# EAGLE board HumidityMetter_TO_PRINT (EAGLE 6.1)
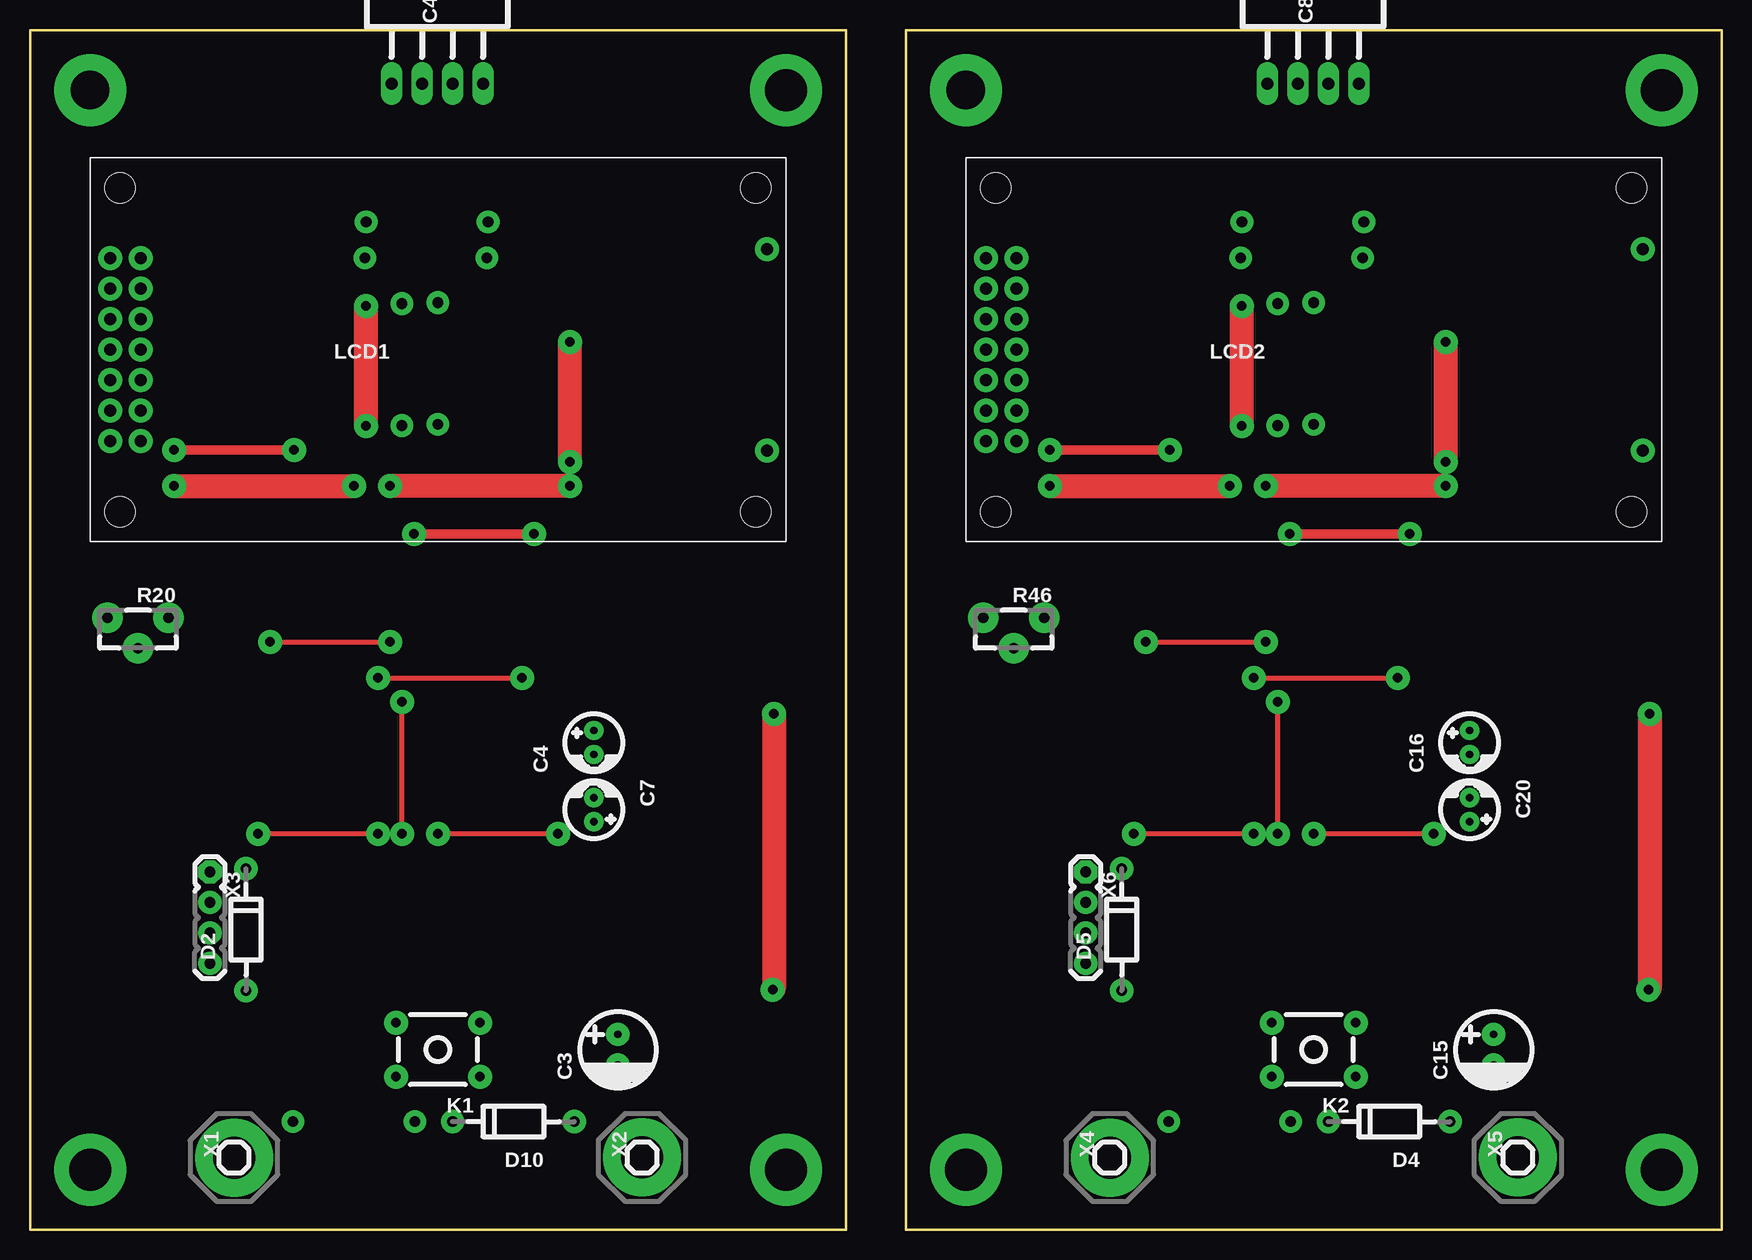
[diagram p0: board, top side]
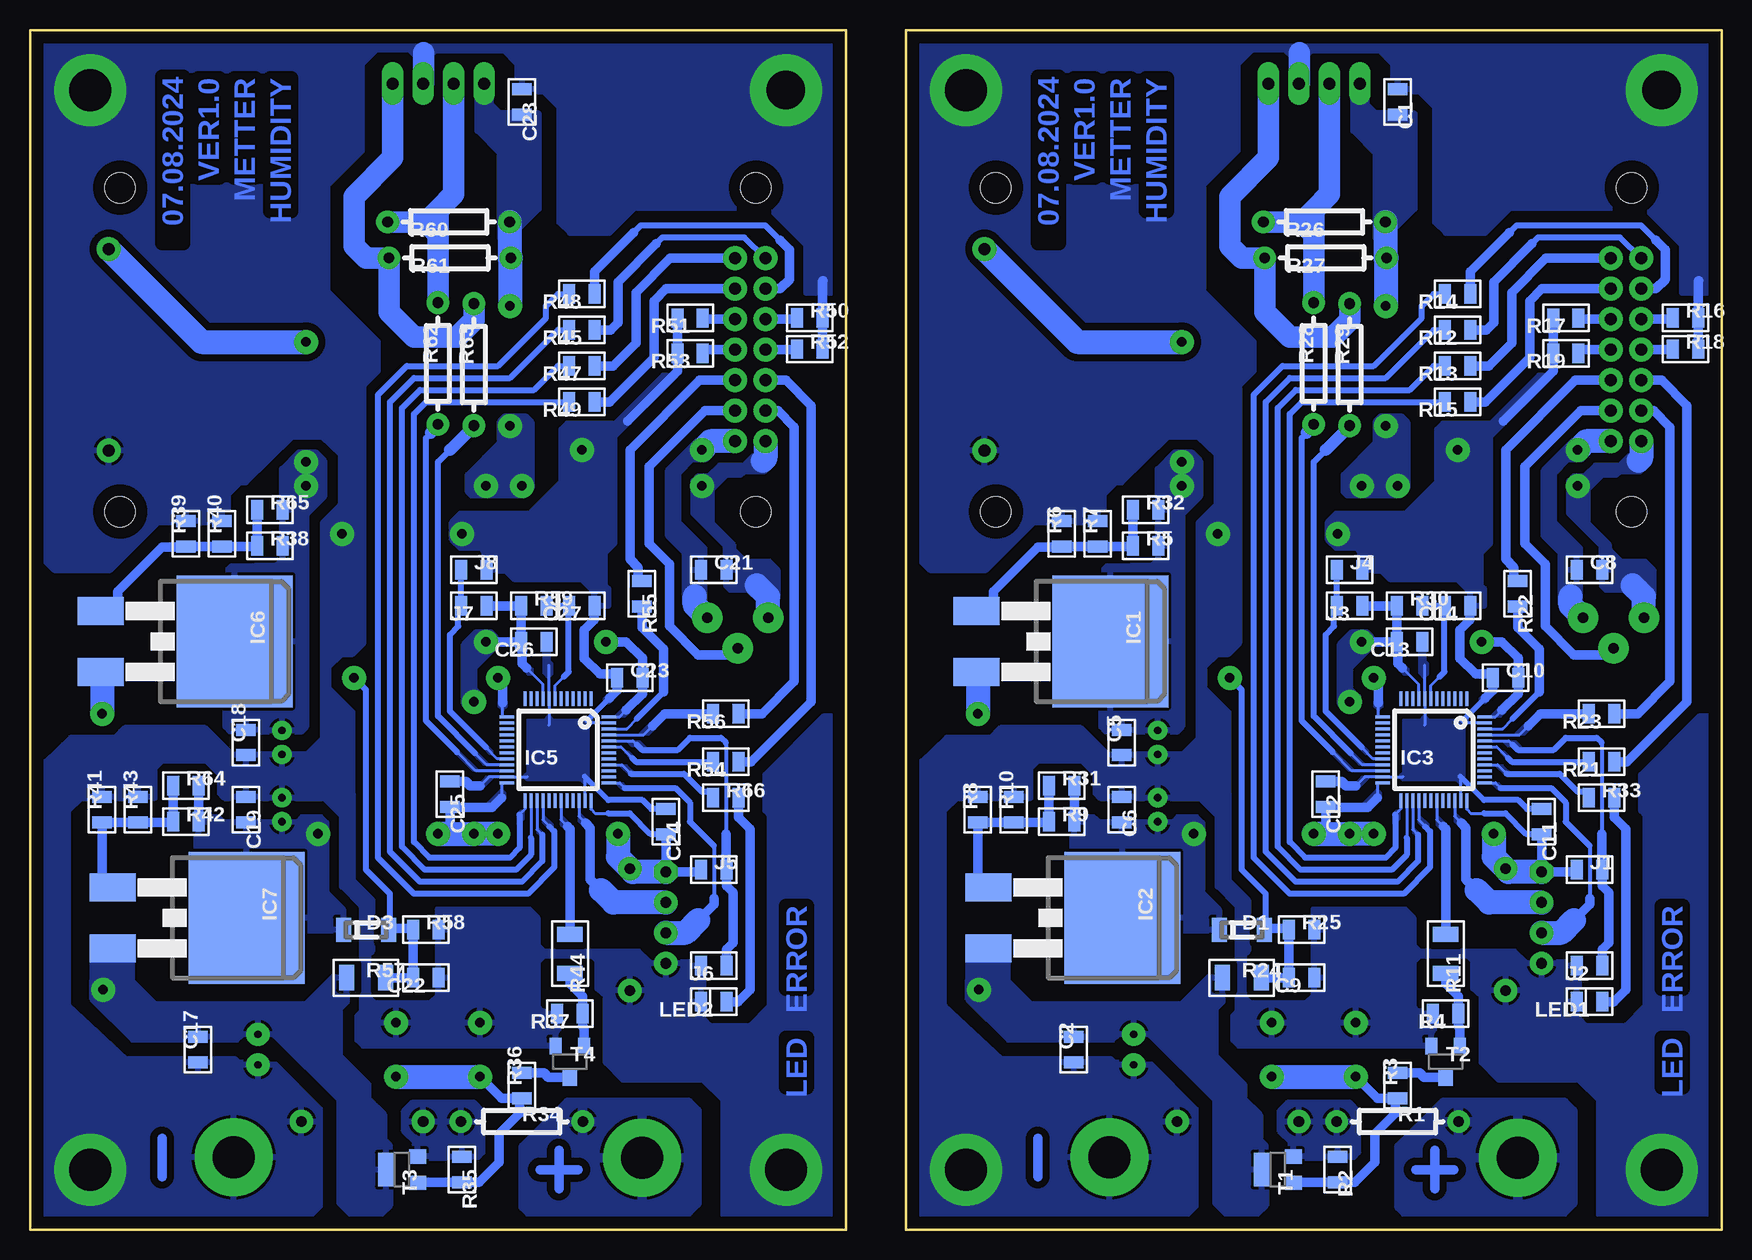
[diagram p1: board, bottom side, seen from below]

Size 141 x 100 mm. Coordinates in mm from the lower left corner, seen from the top.
Outline: 68,0 68,100 0,100 0,0 68,0
Outline: 141,0 141,100 73,100 73,0 141,0
Copper layers (1*16): Top 0.035mm / dielectric 1.5mm / Bottom 0.035mm
Design rules: minimum track width 0.25mm, minimum drill 0.6mm, track to track 0.25mm, track to pad 0.25mm, pad to pad 0.25mm, via to via 0.25mm, smd to smd 0mil, copper to edge 1mm, drill to drill 0.5mm, minimum pad ring 10mil, minimum via ring 8mil, stop-mask expansion 4mil, vias tented up to drill 0mil, thermal gap 10mil

## Footprints (pad centres in the part's own frame; a part is rotated, then mirrored left to right if it is on the bottom)
RSMD_0805 = smd 1 x 1.6: PAD_0 -1.05,0; PAD_1 1.05,0
CE_6.3MM = drill 0.6 pad 1.93: MINUS -1.27,0; PLUS 1.27,0
CE_5.2MM = drill 0.6 pad 1.6: MINUS -1,0; PLUS 1,0
SOD-80 = smd 1.25 x 2: ANODE 1.875,0; CATHODE -1.875,0
DO-41_10MM = drill 0.9 pad 1.93: ANODE -5.08,0; CATHODE 5.08,0
D2PAK = smd 2.32 x 3.81: 1 -2.54,-11.17; 3 2.54,-11.17 | smd 11 x 9.65: 2 0,0
LQFP48 = smd 0.25 x 1.2: 1 -2.75,-4.25; 2 -2.25,-4.25; 3 -1.75,-4.25; 4 -1.25,-4.25; 5 -0.75,-4.25; 6 -0.25,-4.25; 7 0.25,-4.25; 8 0.75,-4.25; 9 1.25,-4.25; 10 1.75,-4.25; 11 2.25,-4.25; 12 2.75,-4.25; 25 2.75,4.25; 26 2.25,4.25; 27 1.75,4.25; 28 1.25,4.25; 29 0.75,4.25; 30 0.25,4.25; 31 -0.25,4.25; 32 -0.75,4.25; 33 -1.25,4.25; 34 -1.75,4.25; 35 -2.25,4.25; 36 -2.75,4.25 | smd 1.2 x 0.25: 13 4.25,-2.75; 14 4.25,-2.25; 15 4.25,-1.75; 16 4.25,-1.25; 17 4.25,-0.75; 18 4.25,-0.25; 19 4.25,0.25; 20 4.25,0.75; 21 4.25,1.25; 22 4.25,1.75; 23 4.25,2.25; 24 4.25,2.75; 37 -4.25,2.75; 38 -4.25,2.25; 39 -4.25,1.75; 40 -4.25,1.25; 41 -4.25,0.75; 42 -4.25,0.25; 43 -4.25,-0.25; 44 -4.25,-0.75; 45 -4.25,-1.25; 46 -4.25,-1.75; 47 -4.25,-2.25; 48 -4.25,-2.75
AM2320_HOR = drill 1 pad 1.8 long: 1 -4.5,3.81; 2 -4.5,1.27; 3 -4.5,-1.27; 4 -4.5,-3.81
KEY_7X4.5 = drill 0.8 pad 2: 1 -3.5,-2.25; 2 3.5,-2.25; 3 3.5,2.25; 4 -3.5,2.25
LCD_0802B(CHINA_CLONE) = drill 1 pad 2: 1 4.24,8.38; 2 1.7,8.38; 3 4.24,10.92; 4 1.7,10.92; 5 4.24,13.46; 6 1.7,13.46; 7 4.24,16; 8 1.7,16; 9 4.24,18.54; 10 1.7,18.54; 11 4.24,21.08; 12 1.7,21.08; 13 4.24,23.62; 14 1.7,23.62; A 56.44,24.4; K 56.44,7.6 | hole 2.5: 2.5,2.5; 2.5,29.5; 55.5,29.5; 55.5,2.5
LED_0805 = smd 1 x 1.6: ANODE -1.05,0; CATHODE 1.05,0
R0207 = drill 0.9 pad 1.9: PAD1 5.08,0; PAD_0 -5.08,0
RSMD_1206_BIG_GAP = smd 1.25 x 2.1: PAD_0 -1.625,0; PAD_1 1.625,0
R_ADJ_STAND = drill 0.9 pad 2.54: 1 -2.54,0; 2 0,2.54; 3 2.54,0
SOT23 = smd 1.2 x 1.4: 1 1.1,1.3; 2 -1.1,1.3 | smd 2.8 x 1.4: 3 0,-1.3
SOT23_SMALL_PADS = smd 1 x 1.4: 1 1.2,1.3; 2 -1.2,1.3 | smd 1.2 x 1.4: 3 0,-1.3
PIN1X1_D3.5MM = drill 3.5 pad 6.5: 1 0,0
PIN4X1_2.54MM = drill 0.9 pad 1.93 octagon: 1 -3.81,0 | drill 0.9 pad 1.93: 2 -1.27,0; 3 1.27,0; 4 3.81,0

## Placement (x,y rotation side)
C1  0.1uF  [RSMD_0805]  27,94 270 bottom
C2  0.1uF  [RSMD_0805]  54,15 90 bottom
C3  100uFx16V  [CE_6.3MM]  49,15 90 top
C4  10uF x 10V  [CE_5.2MM]  47,40.6 90 top
C5  0.1uF  [RSMD_0805]  50,40.6 90 bottom
C6  0.1uF  [RSMD_0805]  50,35 270 bottom
C7  10uF x 10V  [CE_5.2MM]  47,35 270 top
C8  0.1uF  [RSMD_0805]  11,55 0 bottom
C9  0.1uF  [RSMD_0805]  35,21 180 bottom
C10  0.1uF  [RSMD_0805]  18,46 0 bottom
C11  0.1uF  [RSMD_0805]  15,34 270 bottom
C12  0.1uF  [RSMD_0805]  33,36.3 270 bottom
C13  0.1uF  [RSMD_0805]  26,49 180 bottom
C14  0.1uF  [RSMD_0805]  22,52 180 bottom
C15  100uFx16V  [CE_6.3MM]  122,15 90 top
C16  10uF x 10V  [CE_5.2MM]  120,40.6 90 top
C17  0.1uF  [RSMD_0805]  127,15 90 bottom
C18  0.1uF  [RSMD_0805]  123,40.6 90 bottom
C19  0.1uF  [RSMD_0805]  123,35 270 bottom
C20  10uF x 10V  [CE_5.2MM]  120,35 270 top
C21  0.1uF  [RSMD_0805]  84,55 0 bottom
C22  0.1uF  [RSMD_0805]  108,21 180 bottom
C23  0.1uF  [RSMD_0805]  91,46 0 bottom
C24  0.1uF  [RSMD_0805]  88,34 270 bottom
C25  0.1uF  [RSMD_0805]  106,36.3 270 bottom
C26  0.1uF  [RSMD_0805]  99,49 180 bottom
C27  0.1uF  [RSMD_0805]  95,52 180 bottom
C28  0.1uF  [RSMD_0805]  100,94 270 bottom
D1  LL4148  [SOD-80]  39.98,24.98 0 bottom
D2  1N4007  [DO-41_10MM]  18,25 90 top
D3  LL4148  [SOD-80]  112.98,24.98 0 bottom
D4  1N4007  [DO-41_10MM]  113.3,9 180 top
D5  1N4007  [DO-41_10MM]  91,25 90 top
D10  1N4007  [DO-41_10MM]  40.3,9 180 top
IC1  LM317  [D2PAK]  50.94,49.03 270 bottom
IC2  LM317  [D2PAK]  49.94,25.98 270 bottom
IC3  STM32F103C8T6  [LQFP48]  24,40 180 bottom
IC4  AM2320  [AM2320_HOR]  33.95,100.04 90 top
IC5  STM32F103C8T6  [LQFP48]  97,40 180 bottom
IC6  LM317  [D2PAK]  123.94,49.03 270 bottom
IC7  LM317  [D2PAK]  122.94,25.98 270 bottom
IC8  AM2320  [AM2320_HOR]  106.95,100.04 90 top
J1  0  [RSMD_0805]  11,30 0 bottom
J2  0  [RSMD_0805]  11,22 180 bottom
J3  0  [RSMD_0805]  31,52 180 bottom
J4  0  [RSMD_0805]  31,55 0 bottom
J5  0  [RSMD_0805]  84,30 0 bottom
J6  0  [RSMD_0805]  84,22 180 bottom
J7  0  [RSMD_0805]  104,52 180 bottom
J8  0  [RSMD_0805]  104,55 0 bottom
K1  POWER_ON  [KEY_7X4.5]  34,15 180 top
K2  POWER_ON  [KEY_7X4.5]  107,15 180 top
LCD1  LCD_0802B  [LCD_0802B(CHINA_CLONE)]  5,57.34 0 top
LCD2  LCD_0802B  [LCD_0802B(CHINA_CLONE)]  78,57.34 0 top
LED1  ERROR(RED)  [LED_0805]  11,19 180 bottom
LED2  ERROR(RED)  [LED_0805]  84,19 180 bottom
R1  1 Ohm  [R0207]  27,9 0 bottom
R2  10K  [RSMD_0805]  32,5 270 bottom
R3  1K0  [RSMD_0805]  27,12 90 bottom
R4  10K  [RSMD_0805]  23,18 180 bottom
R5  1K0  [RSMD_0805]  48,57 0 bottom
R6  3K0  [RSMD_0805]  55,58 90 bottom
R7  *  [RSMD_0805]  52,58 90 bottom
R8  3K9  [RSMD_0805]  62,35 90 bottom
R9  2K2  [RSMD_0805]  55,34 0 bottom
R10  *  [RSMD_0805]  59,35 90 bottom
R11  1K0  [RSMD_1206_BIG_GAP]  23,23 270 bottom
R12  390R  [RSMD_0805]  22,75 180 bottom
R13  390R  [RSMD_0805]  22,72 180 bottom
R14  390R  [RSMD_0805]  22,78 180 bottom
R15  390R  [RSMD_0805]  22,69 180 bottom
R16  2K0  [RSMD_0805]  3,76 0 bottom
R17  2K0  [RSMD_0805]  12.97,75.99 180 bottom
R18  2K0  [RSMD_0805]  3,73.4 0 bottom
R19  2K0  [RSMD_0805]  12.97,73.05 180 bottom
R20  10K  [R_ADJ_STAND]  9,51 180 top
R21  390R  [RSMD_0805]  10,39 180 bottom
R22  390R  [RSMD_0805]  17,53 270 bottom
R23  390R  [RSMD_0805]  10,43 180 bottom
R24  18K  [RSMD_1206_BIG_GAP]  40,21 0 bottom
R25  6K8  [RSMD_0805]  35,25 0 bottom
R26  4K7  [R0207]  33.1,84 180 bottom
R27  4K7  [R0207]  33,81 180 bottom
R28  200R  [R0207]  34,72.2 90 bottom
R29  200R  [R0207]  31,72.1 90 bottom
R30  10K  [RSMD_0805]  26,52 0 bottom
R31  *  [RSMD_0805]  55,37 0 bottom
R32  *  [RSMD_0805]  48,60 0 bottom
R33  1K0  [RSMD_0805]  10,36 0 bottom
R34  1 Ohm  [R0207]  100,9 0 bottom
R35  10K  [RSMD_0805]  105,5 270 bottom
R36  1K0  [RSMD_0805]  100,12 90 bottom
R37  10K  [RSMD_0805]  96,18 180 bottom
R38  1K0  [RSMD_0805]  121,57 0 bottom
R39  3K0  [RSMD_0805]  128,58 90 bottom
R40  *  [RSMD_0805]  125,58 90 bottom
R41  3K9  [RSMD_0805]  135,35 90 bottom
R42  2K2  [RSMD_0805]  128,34 0 bottom
R43  *  [RSMD_0805]  132,35 90 bottom
R44  1K0  [RSMD_1206_BIG_GAP]  96,23 270 bottom
R45  390R  [RSMD_0805]  95,75 180 bottom
R46  10K  [R_ADJ_STAND]  82,51 180 top
R47  390R  [RSMD_0805]  95,72 180 bottom
R48  390R  [RSMD_0805]  95,78 180 bottom
R49  390R  [RSMD_0805]  95,69 180 bottom
R50  2K0  [RSMD_0805]  76,76 0 bottom
R51  2K0  [RSMD_0805]  85.97,75.99 180 bottom
R52  2K0  [RSMD_0805]  76,73.4 0 bottom
R53  2K0  [RSMD_0805]  85.97,73.05 180 bottom
R54  390R  [RSMD_0805]  83,39 180 bottom
R55  390R  [RSMD_0805]  90,53 270 bottom
R56  390R  [RSMD_0805]  83,43 180 bottom
R57  18K  [RSMD_1206_BIG_GAP]  113,21 0 bottom
R58  6K8  [RSMD_0805]  108,25 0 bottom
R59  10K  [RSMD_0805]  99,52 0 bottom
R60  4K7  [R0207]  106.1,84 180 bottom
R61  4K7  [R0207]  106,81 180 bottom
R62  200R  [R0207]  107,72.2 90 bottom
R63  200R  [R0207]  104,72.1 90 bottom
R64  *  [RSMD_0805]  128,37 0 bottom
R65  *  [RSMD_0805]  121,60 0 bottom
R66  1K0  [RSMD_0805]  83,36 0 bottom
T1  BSS84  [SOT23]  37,5 270 bottom
T2  BC847  [SOT23_SMALL_PADS]  23,14 0 bottom
T3  BSS84  [SOT23]  110,5 270 bottom
T4  BC847  [SOT23_SMALL_PADS]  96,14 0 bottom
X1  +9V  [PIN1X1_D3.5MM]  17,6 90 top
X2  GND  [PIN1X1_D3.5MM]  51.02,6.01 90 top
X3  ISP  [PIN4X1_2.54MM]  15,26 270 top
X4  +9V  [PIN1X1_D3.5MM]  90,6 90 top
X5  GND  [PIN1X1_D3.5MM]  124.02,6.01 90 top
X6  ISP  [PIN4X1_2.54MM]  88,26 270 top

## Library data of the parts
C1-C28 D1-D5 D10 IC1-IC8 J1-J8 K1 K2 LCD1 LCD2 LED1 LED2 R1-R66 T1-T4 X1-X6 = __MyCommonLib1

## Nets
+3.3V: C6.PAD_1 C7.PLUS C10.PAD_1 C11.PAD_1 C12.PAD_1 C13.PAD_1 D1.CATHODE D2.CATHODE IC2.2 IC3.9 IC3.24 IC3.36 IC3.48 J1.PAD_0 J3.PAD_0 R9.PAD_1 R30.PAD_0 R31.PAD_1 X3.1
+3.3V1: C19.PAD_1 C20.PLUS C23.PAD_1 C24.PAD_1 C25.PAD_1 C26.PAD_1 D3.CATHODE D5.CATHODE IC5.9 IC5.24 IC5.36 IC5.48 IC7.2 J5.PAD_0 J7.PAD_0 R42.PAD_1 R59.PAD_0 R64.PAD_1 X6.1
+5V: C1.PAD_1 C4.PLUS C5.PAD_1 C8.PAD_1 IC1.2 IC4.1 LCD1.2 LCD1.A R5.PAD_1 R20.3 R26.PAD_0 R27.PAD_0 R32.PAD_1
+5V1: C16.PLUS C18.PAD_1 C21.PAD_1 C28.PAD_1 IC6.2 IC8.1 LCD2.2 LCD2.A R38.PAD_1 R46.3 R60.PAD_0 R61.PAD_0 R65.PAD_1
ADC_9V: C9.PAD_1 D1.ANODE IC3.13 R24.PAD_1 R25.PAD_0
ADC_9V1: C22.PAD_1 D3.ANODE IC5.13 R57.PAD_1 R58.PAD_0
BOOT0: IC3.44 J1.PAD_1 J2.PAD_0
BOOT1: IC3.20 J3.PAD_1 J4.PAD_0
BOOT2: IC5.20 J7.PAD_1 J8.PAD_0
BOOT3: IC5.44 J5.PAD_1 J6.PAD_0
ERROR_LED: IC3.40 R33.PAD_0
ERROR_LED1: IC5.40 R66.PAD_0
GND: C1.PAD_0 C2.PAD_0 C3.MINUS C4.MINUS C5.PAD_0 C6.PAD_0 C7.MINUS C8.PAD_0 C9.PAD_0 C10.PAD_0 C11.PAD_0 C12.PAD_0 C13.PAD_0 C14.PAD_0 D2.ANODE D10.ANODE IC3.8 IC3.23 IC3.35 IC3.47 IC4.3 J2.PAD_1 J4.PAD_1 K1.1 K1.2 LCD1.1 LCD1.K LED1.CATHODE R4.PAD_1 R6.PAD_1 R7.PAD_1 R8.PAD_1 R10.PAD_1 R16.PAD_1 R17.PAD_1 R18.PAD_1 R19.PAD_1 R20.1 R25.PAD_1 T2.2 X2.1 X3.4
GND1: C15.MINUS C16.MINUS C17.PAD_0 C18.PAD_0 C19.PAD_0 C20.MINUS C21.PAD_0 C22.PAD_0 C23.PAD_0 C24.PAD_0 C25.PAD_0 C26.PAD_0 C27.PAD_0 C28.PAD_0 D4.ANODE D5.ANODE IC5.8 IC5.23 IC5.35 IC5.47 IC8.3 J6.PAD_1 J8.PAD_1 K2.1 K2.2 LCD2.1 LCD2.K LED2.CATHODE R37.PAD_1 R39.PAD_1 R40.PAD_1 R41.PAD_1 R43.PAD_1 R46.1 R50.PAD_1 R51.PAD_1 R52.PAD_1 R53.PAD_1 R58.PAD_1 T4.2 X5.1 X6.4
I2C_SCL: IC3.21 R29.PAD_0
I2C_SCL1: IC5.21 R63.PAD_0
I2C_SDA: IC3.22 R28.PAD_0
I2C_SDA1: IC5.22 R62.PAD_0
LCD_D1: IC5.27 R45.PAD_1
LCD_D2: IC5.26 R47.PAD_1
LCD_D3: IC5.28 R48.PAD_1
LCD_D4: IC3.25 R15.PAD_1
LCD_D5: IC3.28 R14.PAD_1
LCD_D6: IC3.26 R13.PAD_1
LCD_D7: IC3.27 R12.PAD_1
LCD_D8: IC5.25 R49.PAD_1
LCD_E: IC3.43 R21.PAD_1
LCD_E1: IC5.43 R54.PAD_1
LCD_R/~W: IC3.46 R22.PAD_1
LCD_R/~W1: IC5.46 R55.PAD_1
LCD_RS: IC3.45 R23.PAD_1
LCD_RS1: IC5.45 R56.PAD_1
N$1: R1.PAD1 X1.1
N$2: D10.CATHODE R1.PAD_0 R2.PAD_0 T1.2
N$3: K1.3 K1.4 R2.PAD_1 R3.PAD_0 T1.1
N$4: R3.PAD_1 T2.3
N$5: R4.PAD_0 R11.PAD_1 T2.1
N$6: C2.PAD_1 C3.PLUS IC1.3 IC2.3 R24.PAD_0 T1.3
N$7: IC1.1 R5.PAD_0 R6.PAD_0 R7.PAD_0 R32.PAD_0
N$8: IC2.1 R8.PAD_0 R9.PAD_0 R10.PAD_0 R31.PAD_0
N$9: LCD1.3 R20.2
N$10: LCD1.14 R12.PAD_0
N$11: LCD1.13 R13.PAD_0
N$12: LCD1.12 R14.PAD_0
N$13: LCD1.11 R15.PAD_0
N$14: IC4.2 R26.PAD1 R28.PAD1
N$15: LCD1.10 R16.PAD_0
N$16: LCD1.9 R17.PAD_0
N$17: LCD1.8 R18.PAD_0
N$18: LCD1.7 R19.PAD_0
N$19: LED1.ANODE R33.PAD_1
N$20: IC4.4 R27.PAD1 R29.PAD1
N$21: LCD1.4 R23.PAD_0
N$22: LCD1.5 R22.PAD_0
N$23: LCD1.6 R21.PAD_0
N$24: R34.PAD1 X4.1
N$25: D4.CATHODE R34.PAD_0 R35.PAD_0 T3.2
N$26: K2.3 K2.4 R35.PAD_1 R36.PAD_0 T3.1
N$27: R36.PAD_1 T4.3
N$29: R37.PAD_0 R44.PAD_1 T4.1
N$31: C15.PLUS C17.PAD_1 IC6.3 IC7.3 R57.PAD_0 T3.3
N$32: IC6.1 R38.PAD_0 R39.PAD_0 R40.PAD_0 R65.PAD_0
N$33: IC7.1 R41.PAD_0 R42.PAD_0 R43.PAD_0 R64.PAD_0
N$34: LCD2.14 R45.PAD_0
N$35: LCD2.13 R47.PAD_0
N$36: LCD2.12 R48.PAD_0
N$37: LCD2.11 R49.PAD_0
N$38: LCD2.10 R50.PAD_0
N$39: LCD2.9 R51.PAD_0
N$40: LCD2.8 R52.PAD_0
N$41: LCD2.7 R53.PAD_0
N$42: LCD2.4 R56.PAD_0
N$43: LCD2.5 R55.PAD_0
N$44: LCD2.6 R54.PAD_0
N$45: IC8.2 R60.PAD1 R62.PAD1
N$46: IC8.4 R61.PAD1 R63.PAD1
N$47: LCD2.3 R46.2
N$48: LED2.ANODE R66.PAD_1
NRST: C14.PAD_1 IC3.7 R30.PAD_1
NRST1: C27.PAD_1 IC5.7 R59.PAD_1
PWR_HOLD: IC3.31 R11.PAD_0
PWR_HOLD1: IC5.31 R44.PAD_0
SWDCLK: IC3.37 X3.3
SWDCLK1: IC5.37 X6.3
SWDIO: IC3.34 X3.2
SWDIO1: IC5.34 X6.2

## Tracks (layer width: path | path; a pad name or v marks a point on that pad's centre or on a via)
+3.3V  (via drill 0.8 pad 2)
  Top 0.4: v31,33 v31,44 | v44,33 v34,33 | v29,33 v19,33
  Top 0.406: v20,49 v30,49
  Bottom 0.25: IC3.24 28.7,37.25 28.7,36 | IC3.9 25.25,45.45 26.6,46.8 | IC3.48 18.85,42.75 18.3,43.3 | IC3.36 21.25,35.05 20.9,34.7 19.8,34.7
  Bottom 0.4: 49.81,25.86 IC2.2
  Bottom 0.406: 27,48.95 C13.PAD_1
  Bottom 0.5: 19.8,34.7 18,34.7 16.3,33 15.05,33 C11.PAD_1
  Bottom 0.8: 28.7,36 29.5,35.2 32.95,35.2 C12.PAD_1 33,33.5 33.5,33 | 26.6,46.8 27,47.2 27,48.95 | v30,49 C13.PAD_1 R30.PAD_0 J3.PAD_0 | v20,49 18.3,49 16.95,47.65 C10.PAD_1 16.95,44.65 18.3,43.3 | C11.PAD_1 14.9,32.85 15,32.75 X3.1 12.24,29.81 J1.PAD_0 | R31.PAD_1 R9.PAD_1
  Bottom 2: v29,33 v31,33 33.5,33 v34,33 | X3.1 17.73,29.81 D2.CATHODE 19,31.08 v19,33
  pour Bottom: 30.8,43.3 31.3,43.3 31.8,43.8 31.8,48.8 30.8,49.8 29.6,49.8 29.2,49.4 29.2,48.6 31,46.8 31,45.1 30.3,44.4 30.3,43.8
  pour Bottom: 54.1,21.1 54.1,34.4 52.4,34.4 51.9,34 45.7,34 45.3,34.4 43.8,34.4 43.3,33.9 43.3,28.1 41.9,26.7 41.9,24.9 45.9,24.9 45.9,21.1
  pour Bottom (no thermals): 19.2,42.8 18.4,42.8 18,43.2 18.4,43.6
  pour Bottom: 28.9,35.4 28.4,35.9 28.4,36.4 28.7,36.7 30,35.4
  pour Bottom: 26.9,46.7 26.5,46.3 26.1,46.3 26.1,46.7 26.5,47.1
+3.3V1  (via drill 0.8 pad 2)
  Top 0.4: v104,33 v104,44 | v117,33 v107,33 | v102,33 v92,33
  Top 0.406: v93,49 v103,49
  Bottom 0.25: IC5.24 101.7,37.25 101.7,36 | IC5.9 98.25,45.45 99.6,46.8 | IC5.48 91.85,42.75 91.3,43.3 | IC5.36 94.25,35.05 93.9,34.7 92.8,34.7
  Bottom 0.4: 122.81,25.86 IC7.2
  Bottom 0.406: 100,48.95 C26.PAD_1
  Bottom 0.5: 92.8,34.7 91,34.7 89.3,33 88.05,33 C24.PAD_1
  Bottom 0.8: 101.7,36 102.5,35.2 105.95,35.2 C25.PAD_1 106,33.5 106.5,33 | 99.6,46.8 100,47.2 100,48.95 | v103,49 C26.PAD_1 R59.PAD_0 J7.PAD_0 | v93,49 91.3,49 89.95,47.65 C23.PAD_1 89.95,44.65 91.3,43.3 | C24.PAD_1 87.9,32.85 88,32.75 X6.1 85.24,29.81 J5.PAD_0 | R64.PAD_1 R42.PAD_1
  Bottom 2: v102,33 v104,33 106.5,33 v107,33 | X6.1 90.73,29.81 D5.CATHODE 92,31.08 v92,33
  pour Bottom: 103.8,43.3 104.3,43.3 104.8,43.8 104.8,48.8 103.8,49.8 102.6,49.8 102.2,49.4 102.2,48.6 104,46.8 104,45.1 103.3,44.4 103.3,43.8
  pour Bottom: 127.1,21.1 127.1,34.4 125.4,34.4 124.9,34 118.7,34 118.3,34.4 116.8,34.4 116.3,33.9 116.3,28.1 114.9,26.7 114.9,24.9 118.9,24.9 118.9,21.1
  pour Bottom (no thermals): 92.2,42.8 91.4,42.8 91,43.2 91.4,43.6
  pour Bottom: 101.9,35.4 101.4,35.9 101.4,36.4 101.7,36.7 103,35.4
  pour Bottom: 99.9,46.7 99.5,46.3 99.1,46.3 99.1,46.7 99.5,47.1
+5V  (via drill 0.8 pad 2)
  Top 2: v45,62 v30,62 | v12,62 v27,62 | v28,67 v28,77 | v45,64 v45,74
  Bottom 2: LCD1.2 6.7,64.3 6.9,64.1 | R20.3 6.46,52.76 7.4,53.7 | v28,77 28,80.92 R27.PAD_0 arc90 28.02,81.1 R26.PAD_0 | LCD1.A 53.7,74 v45,74
  pour Bottom: 5.7,52.9 7.7,52.9 8.1,53.3 9.6,53.3 10,53.7 10,57 12.7,59.7 12.7,62.4 12.3,62.8 11.4,62.8 10.5,63.7 8.5,63.7 7.5,64.7 6.2,64.7 6.2,63.8 6.8,63.2 8.5,63.2 8.8,62.9 10,62.9 11.2,61.7 11.2,58.9 9.4,57.1 9.4,56.7 8.4,55.7 6.4,55.7 5.7,55
  pour Bottom: 45,41.9 45.4,41.5 51.3,41.5 51.7,41.9 51.7,54.8 51.2,55.3 47.4,55.4 47,55.8 47,63.4 45.6,64.8 44.2,64.8 43.5,64.1 43.5,61.1 45,59.6
  pour Bottom (no thermals): 26.2,61.8 26.8,61.2 31.2,61.2 31.5,61.5 31.5,62.9 28.8,65.6 28.8,67.4 28.4,67.8 26.7,67.8 26.2,67.3
  pour Bottom (no thermals): 28.8,82.6 28.8,89.7 30.7,91.6 30.7,96.2 30.6,96.3 29.7,96.3 29.6,96.2 29.6,93.8 28.9,93.1 25.7,93.1 25.6,93 25.6,85.1 28.1,82.6
+5V1  (via drill 0.8 pad 2)
  Top 2: v118,62 v103,62 | v85,62 v100,62 | v101,67 v101,77 | v118,64 v118,74
  Bottom 2: LCD2.2 79.7,64.3 79.9,64.1 | R46.3 79.46,52.76 80.4,53.7 | v101,77 101,80.92 R61.PAD_0 arc90 101.02,81.1 R60.PAD_0 | LCD2.A 126.7,74 v118,74
  pour Bottom: 78.7,52.9 80.7,52.9 81.1,53.3 82.6,53.3 83,53.7 83,57 85.7,59.7 85.7,62.4 85.3,62.8 84.4,62.8 83.5,63.7 81.5,63.7 80.5,64.7 79.2,64.7 79.2,63.8 79.8,63.2 81.5,63.2 81.8,62.9 83,62.9 84.2,61.7 84.2,58.9 82.4,57.1 82.4,56.7 81.4,55.7 79.4,55.7 78.7,55
  pour Bottom: 118,41.9 118.4,41.5 124.3,41.5 124.7,41.9 124.7,54.8 124.2,55.3 120.4,55.4 120,55.8 120,63.4 118.6,64.8 117.2,64.8 116.5,64.1 116.5,61.1 118,59.6
  pour Bottom (no thermals): 99.2,61.8 99.8,61.2 104.2,61.2 104.5,61.5 104.5,62.9 101.8,65.6 101.8,67.4 101.4,67.8 99.7,67.8 99.2,67.3
  pour Bottom (no thermals): 101.8,82.6 101.8,89.7 103.7,91.6 103.7,96.2 103.6,96.3 102.7,96.3 102.6,96.2 102.6,93.8 101.9,93.1 98.7,93.1 98.6,93 98.6,85.1 101.1,82.6
ADC_9V  (via drill 0.8 pad 2)
  Top 0.4: v29,46 v41,46
  Bottom 0.25: IC3.13 28.6,42.75 28.6,43.9
  Bottom 0.5: v41,46 40,45 40,30 38,28 38,25.09 D1.ANODE
  Bottom 0.8: 28.6,43.9 28.6,45.6 v29,46 | R24.PAD_1 C9.PAD_1 R25.PAD_0 36.13,25.09 38,25.09
  pour Bottom: 28.6,43.3 28.9,43.6 28.9,44 28.3,44 28.3,43.6
ADC_9V1  (via drill 0.8 pad 2)
  Top 0.4: v102,46 v114,46
  Bottom 0.25: IC5.13 101.6,42.75 101.6,43.9
  Bottom 0.5: v114,46 113,45 113,30 111,28 111,25.09 D3.ANODE
  Bottom 0.8: 101.6,43.9 101.6,45.6 v102,46 | R57.PAD_1 C22.PAD_1 R58.PAD_0 109.14,25.09 111,25.09
  pour Bottom: 101.6,43.3 101.9,43.6 101.9,44 101.3,44 101.3,43.6
BOOT0
  Bottom 0.25: IC3.44 17.75,40.75 17.4,40.4
  Bottom 0.35: 10,40.6 10,33
  Bottom 0.5: 10,40.6 10.4,41 13,41 14,40 17,40 17.4,40.4
  Bottom 0.8: J2.PAD_0 9.95,23.35 9.4,23.9 9.4,28.1 9.95,28.65 J1.PAD_1 arc90 10,30.05 10,33
  pour Bottom: 16.5,40 17.2,40 17.5,40.3 17.8,40.3 18.2,40.7 17.2,40.7
BOOT1
  Bottom 0.25: IC3.20 29.05,39.25 30,40.2
  Bottom 0.4: 32,51.95 J3.PAD_1
  Bottom 0.5: 30,40.2 33,43.2 33,49.6 32.3,50.3 32.3,51.75 J3.PAD_1 J4.PAD_0
  pour Bottom: 30.1,40.1 29.7,39.7 29.5,39.7 29.5,39.9 29.9,40.3
BOOT2
  Bottom 0.25: IC5.20 102.05,39.25 103,40.2
  Bottom 0.4: 105,51.95 J7.PAD_1
  Bottom 0.5: 103,40.2 106,43.2 106,49.6 105.3,50.3 105.3,51.75 J7.PAD_1 J8.PAD_0
  pour Bottom: 103.1,40.1 102.7,39.7 102.5,39.7 102.5,39.9 102.9,40.3
BOOT3
  Bottom 0.25: IC5.44 90.75,40.75 90.4,40.4
  Bottom 0.35: 83,40.6 83,33
  Bottom 0.5: 83,40.6 83.4,41 86,41 87,40 90,40 90.4,40.4
  Bottom 0.8: J6.PAD_0 82.95,23.35 82.4,23.9 82.4,28.1 82.95,28.65 J5.PAD_1 arc90 83,30.05 83,33
  pour Bottom: 89.5,40 90.2,40 90.5,40.3 90.8,40.3 91.2,40.7 90.2,40.7
ERROR_LED
  Bottom 0.25: IC3.40 18.65,38.75 17.9,38
  Bottom 0.5: 17.9,38 13.5,38 12,36.5 11.55,36.5 arc90 R33.PAD_0
  pour Bottom: 17.5,37.9 18,37.9 18.8,38.7 18.3,38.7
ERROR_LED1
  Bottom 0.25: IC5.40 91.65,38.75 90.9,38
  Bottom 0.5: 90.9,38 86.5,38 85,36.5 84.55,36.5 arc90 R66.PAD_0
  pour Bottom: 90.5,37.9 91,37.9 91.8,38.7 91.3,38.7
GND  (via drill 0.8 pad 2, 3.2 pad 6, 3.5 pad 6)
  Top 0.8: v12,65 v22,65 | v32,58 v42,58
  Bottom 0.25: IC3.35 21.75,37.65 | 26.55,37.75 IC3.23 29.75,37.75 30.5,37 | IC3.47 21.45,42.25 | 24.75,42.05 IC3.8 24.75,47.05
  Bottom 0.4: 19.7,44.3 21.6,42.4 | 19.8,35.8 21.8,37.8
  Bottom 0.5: 19.8,35.8 16.95,35.8 16.2,35.05 C11.PAD_0
  Bottom 0.8: C12.PAD_0 31.65,37.35 31.3,37 30.5,37 | C14.PAD_0 21,51.95 21,50.8 21.8,50 21.8,47.6 20.5,46.3 19.35,46.3 C10.PAD_0 19.05,44.95 19.7,44.3 | 12.05,22.19 J2.PAD_1 | R17.PAD_1 R19.PAD_1 14.02,71.58 18.2,67.4 | 1.9,79.1 1.95,79.05 R16.PAD_1 R18.PAD_1
  Bottom 1.8: IC4.3 35.2,95.56 35.2,98.1
  Bottom 2: R20.1 12.6,52.06 12.6,52.8 | LCD1.1 11.28,65.72 v12,65
  other vias: 63,95 5,95 63,5 5,5
  pour Bottom: 21.5,37.5 21.2,37.2 21.8,37.2 22.1,37.5 26.6,37.5 26.8,37.7 26.8,37.8 26.5,38.1 26.5,42.5 25.1,42.5 24.8,42.8 24.7,42.8 24.4,42.5 21.6,42.5 21.4,42.7 21.2,42.7 21.2,42.2 21.5,41.9
  pour Bottom: 11.8,56.8 11.8,52.2 13.4,52.2 13.4,56.4 14.8,57.8 14.8,63.3 12.3,65.8 11.6,65.8 11.2,65.4 11.2,64.7 11.7,64.2 12.8,64.2 14,63 14,59
  pour Bottom: 30.1,54.9 30.1,56.5 30.4,56.8 32.1,56.8 32.8,57.5 32.8,59 32.1,59.7 26.3,59.7 23.7,62.3 23.7,66.7 23.2,67.2 19.2,67.2 15.2,71.2 14.2,71.2 19.3,66.1 19.3,57.2 20.1,56.4 20.1,53.7 19.8,53.4 19.8,52 21.1,52 21.1,53.3 22,54.2 27.6,54.2 28.3,54.9
  pour Bottom (isolate 0.6): 43.8,2 43.8,10 47.7,13.9 50.6,13.9 50.9,14.2 60,14.2 64.8,18.7 64.8,34.9 63.7,36 57.6,36 57.6,38.5 57,39.1 53.3,39.1 52.2,38 52.2,36.4 51.8,36 41.4,36 41.1,36.3 41.1,43.1 43.1,45.1 43.1,46.9 42,48 41.1,48 40.2,48.9 40.2,70.4 39,71.6 39,74 43.2,78.2 43.2,87.1 40.3,90 40.3,97.2 39.1,98.4 36.4,98.4 35.8,97.8 34.7,97.8 34.2,98.3 28.5,98.3 27.4,97.2 27.4,94.9 25.2,94.9 23.9,93.6 23.9,84 23,83.1 19.7,83.1 17.6,85.2 6.4,85.2 3.3,82.1 3.3,78.1 1.2,78.1 1.2,98.8 66.8,98.8 66.7,89.9 66.8,64 66.8,55.8 66,55 61.3,55 57.3,59 51.5,59 51.5,61.3 50.5,62.3 50,62.3 46.1,66.1 43.7,66.1 42.1,64.6 42.1,60.4 43.6,58.9 43.6,40.9 44.9,39.6 51.2,39.6 53.4,41.8 60.1,41.8 60.9,41 64.6,41 66.7,39 66.7,1.3 44.5,1.3
  pour Bottom (isolate 0.6): 24.2,15.3 40.2,15.3 40.7,15.8 40.7,17.8 40.3,18.2 40.3,26.9 42,28.6 42,34.5 43.5,36 43.8,36 43.8,36.3 41.1,36.3 41.1,29.1 39.5,27.5 39.5,23.2 39.8,22.9 39.8,19.4 39.3,18.9 34.6,18.9 34,19.5 34,26.7 26.4,26.7 25.7,26 25.7,23.7 25.2,23.2 17.3,23.2 16.4,22.3 11.9,22.3 11.9,17.6 11.3,17 8,17 6.3,18.7 6.3,34.5 6.7,34.9 6.7,37.9 1.8,42.8 1.2,42.8 1.2,1.2 10.2,1.2 10.2,10.8 11.9,12.5 18.6,12.5 20,13.9 20,19.5 20.7,20.1 20.7,22.4 21.1,22.8 25.2,22.8 25.7,22.3 25.7,18.6 25.3,18.2 23.8,18.2 23.8,16.8 24.2,16.4
  pour Bottom: 30.5,36.7 30.4,36.7 29.4,37.7 30,37.7 30.5,37.2
  pour Bottom (no thermals): 25.2,49.1 25.2,46.4 24.8,46 24.5,46.3 24.5,47.2 24.7,47.4 24.7,49.1
  pour Bottom: 20.1,43.9 20.1,44.3 19.8,44.6 19.4,44.2 19.7,43.9
GND1  (via drill 0.8 pad 2, 3.2 pad 6, 3.5 pad 6)
  Top 0.8: v85,65 v95,65 | v105,58 v115,58
  Bottom 0.25: IC5.35 94.75,37.65 | 99.55,37.75 IC5.23 102.75,37.75 103.5,37 | IC5.47 94.45,42.25 | 97.75,42.05 IC5.8 97.75,47.05
  Bottom 0.4: 92.7,44.3 94.6,42.4 | 92.8,35.8 94.8,37.8
  Bottom 0.5: 92.8,35.8 89.95,35.8 89.2,35.05 C24.PAD_0
  Bottom 0.8: C25.PAD_0 104.65,37.35 104.3,37 103.5,37 | C27.PAD_0 94,51.95 94,50.8 94.8,50 94.8,47.6 93.5,46.3 92.35,46.3 C23.PAD_0 92.05,44.95 92.7,44.3 | 85.05,22.19 J6.PAD_1 | R51.PAD_1 R53.PAD_1 87.02,71.58 91.2,67.4 | 74.9,79.1 74.95,79.05 R50.PAD_1 R52.PAD_1
  Bottom 1.8: IC8.3 108.2,95.56 108.2,98.1
  Bottom 2: R46.1 85.6,52.06 85.6,52.8 | LCD2.1 84.28,65.72 v85,65
  other vias: 136,95 78,95 136,5 78,5
  pour Bottom: 94.5,37.5 94.2,37.2 94.8,37.2 95.1,37.5 99.6,37.5 99.8,37.7 99.8,37.8 99.5,38.1 99.5,42.5 98.1,42.5 97.8,42.8 97.7,42.8 97.4,42.5 94.6,42.5 94.4,42.7 94.2,42.7 94.2,42.2 94.5,41.9
  pour Bottom: 84.8,56.8 84.8,52.2 86.4,52.2 86.4,56.4 87.8,57.8 87.8,63.3 85.3,65.8 84.6,65.8 84.2,65.4 84.2,64.7 84.7,64.2 85.8,64.2 87,63 87,59
  pour Bottom: 103.1,54.9 103.1,56.5 103.4,56.8 105.1,56.8 105.8,57.5 105.8,59 105.1,59.7 99.3,59.7 96.7,62.3 96.7,66.7 96.2,67.2 92.2,67.2 88.2,71.2 87.2,71.2 92.3,66.1 92.3,57.2 93.1,56.4 93.1,53.7 92.8,53.4 92.8,52 94.1,52 94.1,53.3 95,54.2 100.6,54.2 101.3,54.9
  pour Bottom (isolate 0.6): 116.8,2 116.8,10 120.7,13.9 123.6,13.9 123.9,14.2 133,14.2 137.8,18.7 137.8,34.9 136.7,36 130.6,36 130.6,38.5 130,39.1 126.3,39.1 125.2,38 125.2,36.4 124.8,36 114.4,36 114.1,36.3 114.1,43.1 116.1,45.1 116.1,46.9 115,48 114.1,48 113.2,48.9 113.2,70.4 112,71.6 112,74 116.2,78.2 116.2,87.1 113.3,90 113.3,97.2 112.1,98.4 109.4,98.4 108.8,97.8 107.7,97.8 107.2,98.3 101.5,98.3 100.4,97.2 100.4,94.9 98.2,94.9 96.9,93.6 96.9,84 96,83.1 92.7,83.1 90.6,85.2 79.4,85.2 76.3,82.1 76.3,78.1 74.2,78.1 74.2,98.8 139.8,98.8 139.7,89.9 139.8,64 139.8,55.8 139,55 134.3,55 130.3,59 124.5,59 124.5,61.3 123.5,62.3 123,62.3 119.1,66.1 116.7,66.1 115.1,64.6 115.1,60.4 116.6,58.9 116.6,40.9 117.9,39.6 124.2,39.6 126.4,41.8 133.1,41.8 133.9,41 137.6,41 139.7,39 139.7,1.3 117.5,1.3
  pour Bottom (isolate 0.6): 97.2,15.3 113.2,15.3 113.7,15.8 113.7,17.8 113.3,18.2 113.3,26.9 115,28.6 115,34.5 116.5,36 116.8,36 116.8,36.3 114.1,36.3 114.1,29.1 112.5,27.5 112.5,23.2 112.8,22.9 112.8,19.4 112.3,18.9 107.6,18.9 107,19.5 107,26.7 99.4,26.7 98.7,26 98.7,23.7 98.2,23.2 90.3,23.2 89.4,22.3 84.9,22.3 84.9,17.6 84.3,17 81,17 79.3,18.7 79.3,34.5 79.7,34.9 79.7,37.9 74.8,42.8 74.2,42.8 74.2,1.2 83.2,1.2 83.2,10.8 84.9,12.5 91.6,12.5 93,13.9 93,19.5 93.7,20.1 93.7,22.4 94.1,22.8 98.2,22.8 98.7,22.3 98.7,18.6 98.3,18.2 96.8,18.2 96.8,16.8 97.2,16.4
  pour Bottom: 103.5,36.7 103.4,36.7 102.4,37.7 103,37.7 103.5,37.2
  pour Bottom (no thermals): 98.2,49.1 98.2,46.4 97.8,46 97.5,46.3 97.5,47.2 97.7,47.4 97.7,49.1
  pour Bottom: 93.1,43.9 93.1,44.3 92.8,44.6 92.4,44.2 92.7,43.9
I2C_SCL
  Bottom 0.25: IC3.21 29.95,38.75 30.9,39.7
  Bottom 0.5: 30.9,39.7 34,42.8 34,64 33,65
  Bottom 1: R29.PAD_0 31,67 33,65
  pour Bottom: 31.1,39.7 30.2,38.8 29.8,38.8 30.9,39.9
I2C_SCL1
  Bottom 0.25: IC5.21 102.95,38.75 103.9,39.7
  Bottom 0.5: 103.9,39.7 107,42.8 107,64 106,65
  Bottom 1: R63.PAD_0 104,67 106,65
  pour Bottom: 104.1,39.7 103.2,38.8 102.8,38.8 103.9,39.9
I2C_SDA
  Bottom 0.25: IC3.22 30.85,38.25 32.4,39.8
  Bottom 0.5: 32.4,39.8 35,42.4 35,66 34.6,66.4
  Bottom 1: R28.PAD_0 34,67 34.6,66.4
  pour Bottom: 32.5,39.7 31.1,38.3 30.7,38.3 32.3,39.9
I2C_SDA1
  Bottom 0.25: IC5.22 103.85,38.25 105.4,39.8
  Bottom 0.5: 105.4,39.8 108,42.4 108,66 107.6,66.4
  Bottom 1: R62.PAD_0 107,67 107.6,66.4
  pour Bottom: 105.5,39.7 104.1,38.3 103.7,38.3 105.3,39.9
LCD_D1
  Bottom 0.25: IC5.27 98.75,33.35 98.3,32.9
  Bottom 0.5: 98.3,32.9 98.3,30.7 100,29 108.5,29 111,31.5 111,69 109,71 101,71 97,75 R45.PAD_1
  pour Bottom: 98.2,32.6 98.2,33 98.7,33.5 98.7,33.1
LCD_D2
  Bottom 0.25: IC5.26 99.25,32.65
  Bottom 0.5: 99.25,32.65 99.25,31.25 100.5,30 108.1,30 110,31.9 110,68.5 108.5,70 99,70 97,72 R47.PAD_1
LCD_D3
  Bottom 0.25: IC5.28 98.25,34.15 97.7,33.6
  Bottom 0.5: 97.7,33.6 97.3,33.2 97.3,30.2 99.5,28 109,28 112,31 112,69.6 109.6,72 102,72 98,76 98,77 97,78 R48.PAD_1
  pour Bottom: 97.5,33.2 98.2,33.9 98.2,34.5 97.5,33.8
LCD_D4
  Bottom 0.25: IC3.25 26.75,35.05 27.2,34.6
  Bottom 0.5: 27.2,34.6 27.2,31.8 28,31 34.7,31 36,32.3 36,68 35,69 R15.PAD_1
  pour Bottom (no thermals): 27.3,33.8 27.3,34.7 27.1,34.9 26.9,34.9 26.9,34.2
LCD_D5
  Bottom 0.25: IC3.28 25.25,34.15 24.7,33.6
  Bottom 0.5: 24.7,33.6 24.3,33.2 24.3,30.2 26.5,28 36,28 39,31 39,69.6 36.6,72 29,72 25,76 25,77 24,78 R14.PAD_1
  pour Bottom: 24.5,33.2 25.2,33.9 25.2,34.5 24.5,33.8
LCD_D6
  Bottom 0.25: IC3.26 26.25,32.65
  Bottom 0.5: 26.25,32.65 26.25,31.25 27.5,30 35.1,30 37,31.9 37,68.5 35.5,70 26,70 24,72 R13.PAD_1
LCD_D7
  Bottom 0.25: IC3.27 25.75,33.35 25.3,32.9
  Bottom 0.5: 25.3,32.9 25.3,30.7 27,29 35.5,29 38,31.5 38,69 36,71 28,71 24,75 R12.PAD_1
  pour Bottom: 25.2,32.6 25.2,33 25.7,33.5 25.7,33.1
LCD_D8
  Bottom 0.25: IC5.25 99.75,35.05 100.2,34.6
  Bottom 0.5: 100.2,34.6 100.2,31.8 101,31 107.7,31 109,32.3 109,68 108,69 R49.PAD_1
  pour Bottom (no thermals): 100.3,33.8 100.3,34.7 100.1,34.9 99.9,34.9 99.9,34.2
LCD_E
  Bottom 0.25: IC3.43 18.75,40.25 17.8,39.3
  Bottom 0.5: 17.8,39.3 17.5,39 R21.PAD_1
  pour Bottom: 17.8,39.2 18.4,39.8 18.1,39.8 17.5,39.2
LCD_E1
  Bottom 0.25: IC5.43 91.75,40.25 90.8,39.3
  Bottom 0.5: 90.8,39.3 90.5,39 R54.PAD_1
  pour Bottom: 90.8,39.2 91.4,39.8 91.1,39.8 90.5,39.2
LCD_R/~W
  Bottom 0.25: IC3.46 18.25,41.75 17.4,42.6
  Bottom 0.5: 17.4,42.6 15.2,44.8
  Bottom 0.8: R22.PAD_1 17,50.2 15.2,48.4 15.2,44.8
LCD_R/~W1
  Bottom 0.25: IC5.46 91.25,41.75 90.4,42.6
  Bottom 0.5: 90.4,42.6 88.2,44.8
  Bottom 0.8: R55.PAD_1 90,50.2 88.2,48.4 88.2,44.8
LCD_RS
  Bottom 0.25: IC3.45 16.85,41.25 16.1,42
  Bottom 0.8: R23.PAD_1 15.1,43 16.1,42
  pour Bottom: 17.2,41.3 16.4,41.3 15.9,41.8 16.3,42.2
LCD_RS1
  Bottom 0.25: IC5.45 89.85,41.25 89.1,42
  Bottom 0.8: R56.PAD_1 88.1,43 89.1,42
  pour Bottom: 90.2,41.3 89.4,41.3 88.9,41.8 89.3,42.2
N$1
  pour Bottom (isolate 0.6): 12.4,2.2 13.2,1.4 26.4,1.4 26.9,1.9 26.9,6.9 23.2,10.6 13.1,10.6 12.4,9.9
N$2
  pour Bottom: 30.7,6 35.9,5.9 35.9,7.3 36.8,8.2 36.8,9.9 36.1,10.6 31,10.6 30.3,9.9 30.3,6.4
N$3
  Bottom 0.8: T1.1 35.65,3.95 R2.PAD_1 30.55,3.95 28.9,5.6 28.9,8 27.2,9.7 27.2,10.75 R3.PAD_0 28.7,10.95 K1.3
  Bottom 2: K1.4 K1.3
N$4
  Bottom 0.8: T2.3 24.8,12.7 25.15,13.05 R3.PAD_1
N$5
  Bottom 0.8: T2.1 21.8,16.8 21.95,16.95 R4.PAD_0 21.95,19.45 23,20.5 R11.PAD_1
N$6  (via drill 0.8 pad 2)
  Top 2: v62,43 62,20.1 v61.9,20
  Bottom 0.4: 62,46.38 IC1.3
  Bottom 2: 62,46.38 v62,43
  pour Bottom: 38,2 38.7,1.3 41.3,1.3 42.2,2.2 42.2,10.8 47.6,16.2 50.4,16.2 50.8,15.8 59.4,15.8 62.8,19.2 62.8,20.8 59.6,20.8 57.6,18.8 45,18.8 42.7,21.1 41.6,21.1 41.6,19 42.2,18.4 42.2,14.5 39.8,12.1 39.8,10.9 38.5,9.6 38.5,7.5 38,7
  pour Bottom (no thermals): 59.5,19.2 59.5,24.3 62.8,24.3 62.8,19.2
N$7
  Bottom 0.8: IC1.1 60.7,51.57 60.7,53.2 57,56.9 55.05,56.9 R6.PAD_0 R7.PAD_0 49.1,56.95 R5.PAD_0 R32.PAD_0
N$8
  Bottom 0.4: IC2.1 60,28.52 | 56.05,33.95 R9.PAD_0
  Bottom 0.8: R31.PAD_0 56.05,34.05 56.1,34 R9.PAD_0 56.1,33.95 R10.PAD_0 R8.PAD_0 62,28.52 IC2.1
N$9
  Bottom 0.8: R20.2 9.56,47.9 12.3,47.9 14.7,50.3 14.7,55.5 16.4,57.2 16.4,63.6 11.74,68.26 LCD1.3
N$10
  Bottom 0.5: LCD1.14 8.44,82.7 15.3,82.7 15.8,82.2
  Bottom 0.8: R12.PAD_0 19.6,75 19,75.6 19,79 15.8,82.2
N$11
  Bottom 0.8: LCD1.13 14.64,80.96 17.5,78.1 17.5,73.9 19.4,72 R13.PAD_0
N$12
  Bottom 0.5: 5.5,82.5 6.7,83.7 17.1,83.7 17.7,83.1
  Bottom 0.8: R14.PAD_0 20.95,79.85 17.7,83.1 | LCD1.12 5.48,78.42 4.7,79.2 4.7,81.7 5.5,82.5
N$13
  Bottom 0.8: LCD1.11 14.98,78.42 16,77.4 16,72.7 19.7,69 R15.PAD_0
N$14
  Bottom 1.8: R26.PAD1 35,84 | 35,84 34,83 | 34,83 34,85 | 34,85 35,84 | 34,83 R28.PAD1 | IC4.2 32.68,86.32 34,85
N$15
  Bottom 0.8: LCD1.10 4.17,75.88 R16.PAD_0
N$16
  Bottom 0.8: LCD1.9 11.81,75.88 R17.PAD_0
N$17
  Bottom 0.8: LCD1.8 4.11,73.34 R18.PAD_0
N$18
  Bottom 0.8: LCD1.7 11.63,73.34 R19.PAD_0
N$19
  Bottom 0.8: LED1.ANODE 9,19 8,20 8,33.4 8.95,34.35 R33.PAD_1
N$20
  Bottom 1.8: IC4.4 37.76,89.34 41,86.1 41,82 40,81 R27.PAD1 38.08,76.48 36,74.4 32.4,74.4 31,75.8 R29.PAD1
N$21
  Bottom 0.8: R23.PAD_0 7,43 4.3,45.7 4.3,66.9 5.66,68.26 LCD1.4
N$22
  Bottom 0.8: LCD1.5 12.2,70.8 18,65 18,55.9 17.3,55.2 17.3,54.35 R22.PAD_0
N$23
  Bottom 0.8: R21.PAD_0 7.9,39 2.9,44 2.9,68.7 5,70.8 LCD1.6
N$24
  pour Bottom (isolate 0.6): 85.4,2.2 86.2,1.4 99.4,1.4 99.9,1.9 99.9,6.9 96.2,10.6 86.1,10.6 85.4,9.9
N$25
  pour Bottom: 103.7,6 108.9,5.9 108.9,7.3 109.8,8.2 109.8,9.9 109.1,10.6 104,10.6 103.3,9.9 103.3,6.4
N$26
  Bottom 0.8: T3.1 108.65,3.95 R35.PAD_1 103.55,3.95 101.9,5.6 101.9,8 100.2,9.7 100.2,10.75 R36.PAD_0 101.7,10.95 K2.3
  Bottom 2: K2.4 K2.3
N$27
  Bottom 0.8: T4.3 97.8,12.7 98.15,13.05 R36.PAD_1
N$28
  Bottom 0.8: 23.9,3.4 23.9,5 | 23.9,5 22.3,5 | 25.5,5 23.9,5 | 23.9,6.6 23.9,5
N$29
  Bottom 0.8: T4.1 94.8,16.8 94.95,16.95 R37.PAD_0 94.95,19.45 96,20.5 R44.PAD_1
N$30
  Bottom 0.8: 57,4.4 57,7.6
N$31  (via drill 0.8 pad 2)
  Top 2: v135,43 135,20.1 v134.9,20
  Bottom 0.4: 135,46.38 IC6.3
  Bottom 2: 135,46.38 v135,43
  pour Bottom: 111,2 111.7,1.3 114.3,1.3 115.2,2.2 115.2,10.8 120.6,16.2 123.4,16.2 123.8,15.8 132.4,15.8 135.8,19.2 135.8,20.8 132.6,20.8 130.6,18.8 118,18.8 115.7,21.1 114.6,21.1 114.6,19 115.2,18.4 115.2,14.5 112.8,12.1 112.8,10.9 111.5,9.6 111.5,7.5 111,7
  pour Bottom (no thermals): 132.5,19.2 132.5,24.3 135.8,24.3 135.8,19.2
N$32
  Bottom 0.8: IC6.1 133.7,51.57 133.7,53.2 130,56.9 128.05,56.9 R39.PAD_0 R40.PAD_0 122.1,56.95 R38.PAD_0 R65.PAD_0
N$33
  Bottom 0.4: IC7.1 133,28.52 | 129.05,33.95 R42.PAD_0
  Bottom 0.8: R64.PAD_0 129.05,34.05 129.1,34 R42.PAD_0 129.1,33.95 R43.PAD_0 R41.PAD_0 135,28.52 IC7.1
N$34
  Bottom 0.5: LCD2.14 81.44,82.7 88.3,82.7 88.8,82.2
  Bottom 0.8: R45.PAD_0 92.6,75 92,75.6 92,79 88.8,82.2
N$35
  Bottom 0.8: LCD2.13 87.64,80.96 90.5,78.1 90.5,73.9 92.4,72 R47.PAD_0
N$36
  Bottom 0.5: 78.5,82.5 79.7,83.7 90.1,83.7 90.7,83.1
  Bottom 0.8: R48.PAD_0 93.95,79.85 90.7,83.1 | LCD2.12 78.48,78.42 77.7,79.2 77.7,81.7 78.5,82.5
N$37
  Bottom 0.8: LCD2.11 87.98,78.42 89,77.4 89,72.7 92.7,69 R49.PAD_0
N$38
  Bottom 0.8: LCD2.10 77.17,75.88 R50.PAD_0
N$39
  Bottom 0.8: LCD2.9 84.81,75.88 R51.PAD_0
N$40
  Bottom 0.8: LCD2.8 77.11,73.34 R52.PAD_0
N$41
  Bottom 0.8: LCD2.7 84.63,73.34 R53.PAD_0
N$42
  Bottom 0.8: R56.PAD_0 80,43 77.3,45.7 77.3,66.9 78.66,68.26 LCD2.4
N$43
  Bottom 0.8: LCD2.5 85.2,70.8 91,65 91,55.9 90.3,55.2 90.3,54.35 R55.PAD_0
N$44
  Bottom 0.8: R54.PAD_0 80.9,39 75.9,44 75.9,68.7 78,70.8 LCD2.6
N$45
  Bottom 1.8: R60.PAD1 108,84 | 108,84 107,83 | 107,83 107,85 | 107,85 108,84 | 107,83 R62.PAD1 | IC8.2 105.68,86.32 107,85
N$46
  Bottom 1.8: IC8.4 110.76,89.34 114,86.1 114,82 113,81 R61.PAD1 111.08,76.48 109,74.4 105.4,74.4 104,75.8 R63.PAD1
N$47
  Bottom 0.8: R46.2 82.56,47.9 85.3,47.9 87.7,50.3 87.7,55.5 89.4,57.2 89.4,63.6 84.74,68.26 LCD2.3
N$48
  Bottom 0.8: LED2.ANODE 82,19 81,20 81,33.4 81.95,34.35 R66.PAD_1
N$49
  Bottom 0.8: 96.9,3.4 96.9,5 | 96.9,5 95.3,5 | 98.5,5 96.9,5 | 96.9,6.6 96.9,5
N$50
  Bottom 0.8: 130,4.4 130,7.6
NRST
  Bottom 0.25: IC3.7 24.25,45.35 23.5,46.1
  Bottom 0.406: 23,51.95 C14.PAD_1
  Bottom 0.5: 23.5,46.1 23.1,46.5 23.1,51.95 | C14.PAD_1 23.1,51.95 | 23.1,51.95 23.15,52 R30.PAD_1
NRST1
  Bottom 0.25: IC5.7 97.25,45.35 96.5,46.1
  Bottom 0.406: 96,51.95 C27.PAD_1
  Bottom 0.5: 96.5,46.1 96.1,46.5 96.1,51.95 | C27.PAD_1 96.1,51.95 | 96.1,51.95 96.15,52 R59.PAD_1
PWR_HOLD
  Bottom 0.25: IC3.31 23.75,34.15 23.2,33.6
  Bottom 0.8: 23.2,33.6 23,33.4 R11.PAD_0
  pour Bottom: 23.2,33.2 23.7,33.7 23.7,34.5 23.2,34
PWR_HOLD1
  Bottom 0.25: IC5.31 96.75,34.15 96.2,33.6
  Bottom 0.8: 96.2,33.6 96,33.4 R44.PAD_0
  pour Bottom: 96.2,33.2 96.7,33.7 96.7,34.5 96.2,34
SWDCLK
  Bottom 0.25: IC3.37 18.85,37.25 18.4,36.8
  Bottom 0.35: 11,32 11,27.6
  Bottom 0.5: 18.4,36.8 14.2,36.8 13,35.6 13,34 11,32
  Bottom 0.8: 12.3,25.8 11,27.1 11,27.6
  Bottom 2: X3.3 13.37,24.73 12.3,25.8
  pour Bottom (no thermals): 18.1,36.7 18.6,36.7 19.1,37.2 18.6,37.2
SWDCLK1
  Bottom 0.25: IC5.37 91.85,37.25 91.4,36.8
  Bottom 0.35: 84,32 84,27.6
  Bottom 0.5: 91.4,36.8 87.2,36.8 86,35.6 86,34 84,32
  Bottom 0.8: 85.3,25.8 84,27.1 84,27.6
  Bottom 2: X6.3 86.37,24.73 85.3,25.8
  pour Bottom (no thermals): 91.1,36.7 91.6,36.7 92.1,37.2 91.6,37.2
SWDIO
  Bottom 0.25: IC3.34 22.25,34.45 21.7,33.9
  Bottom 0.8: 21.7,33.9 21.3,33.5 21.3,29.2 20.4,28.3
  Bottom 2: X3.2 19.37,27.27 20.4,28.3
  pour Bottom: 21.5,33.3 22.2,34 22.2,34.7 21.5,34
SWDIO1
  Bottom 0.25: IC5.34 95.25,34.45 94.7,33.9
  Bottom 0.8: 94.7,33.9 94.3,33.5 94.3,29.2 93.4,28.3
  Bottom 2: X6.2 92.37,27.27 93.4,28.3
  pour Bottom: 94.5,33.3 95.2,34 95.2,34.7 94.5,34

## Text on the board
Bottom: HUMIDITY | METTER | VER1.0 | 07.08.2024 | HUMIDITY | METTER | VER1.0 | 07.08.2024 | ERROR | ERROR | LED | LED